# EAGLE board CPC_RAM512K_V1.00 (EAGLE 6.4)
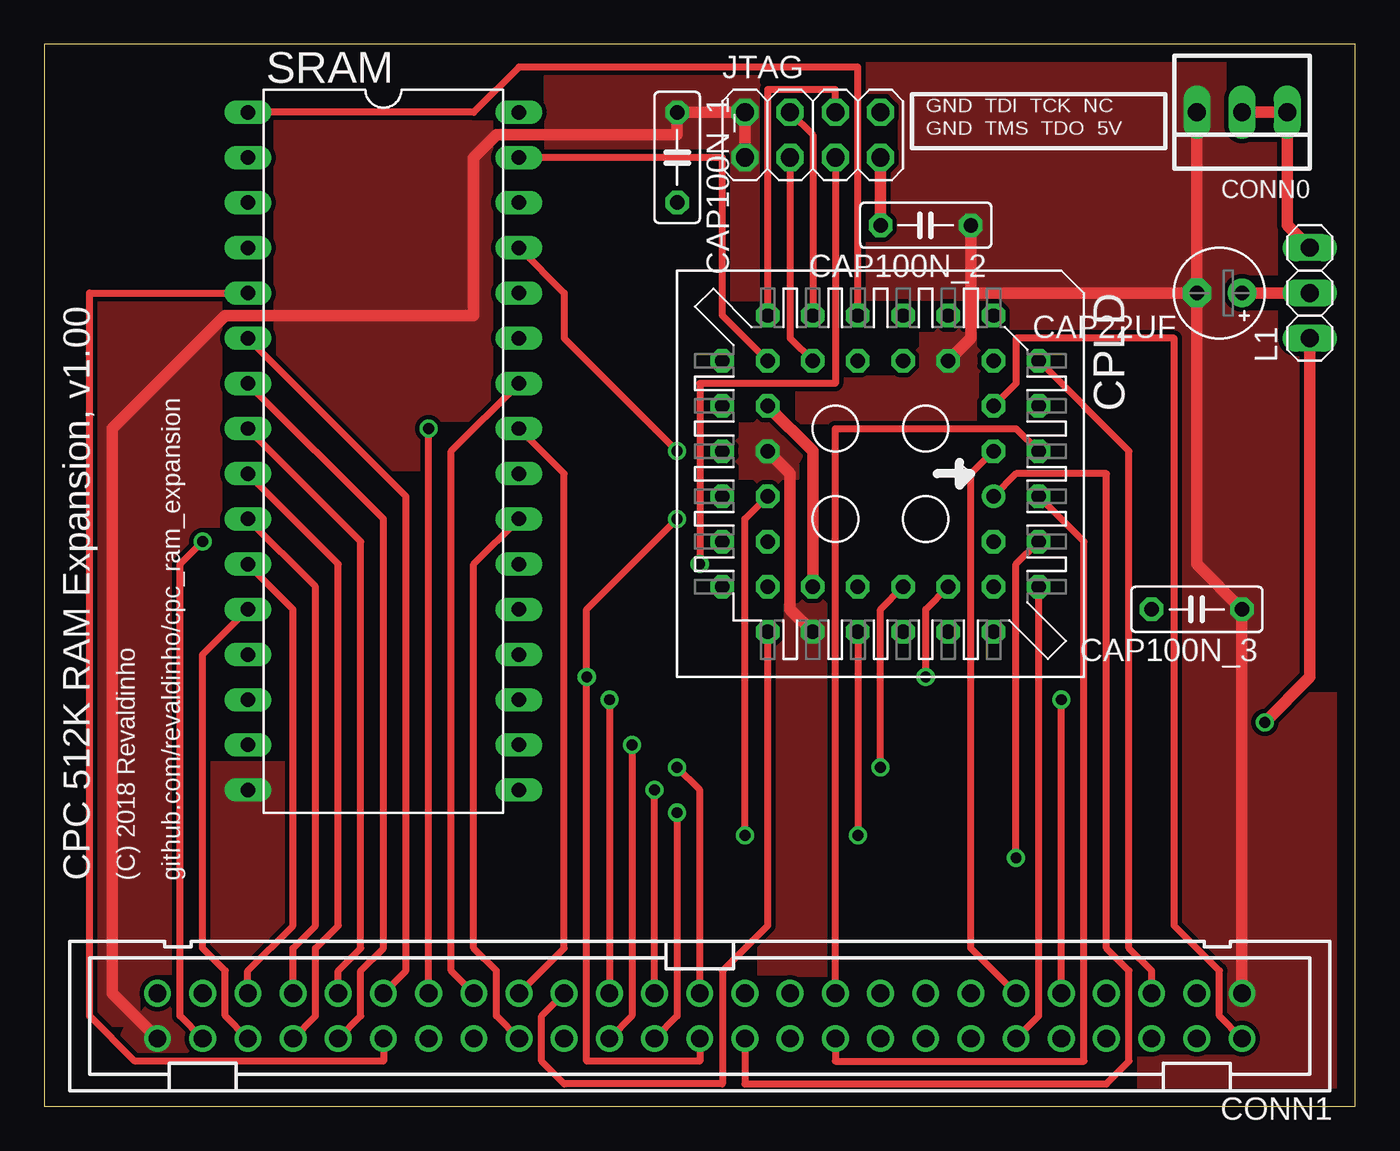
[diagram p0: board, top side]
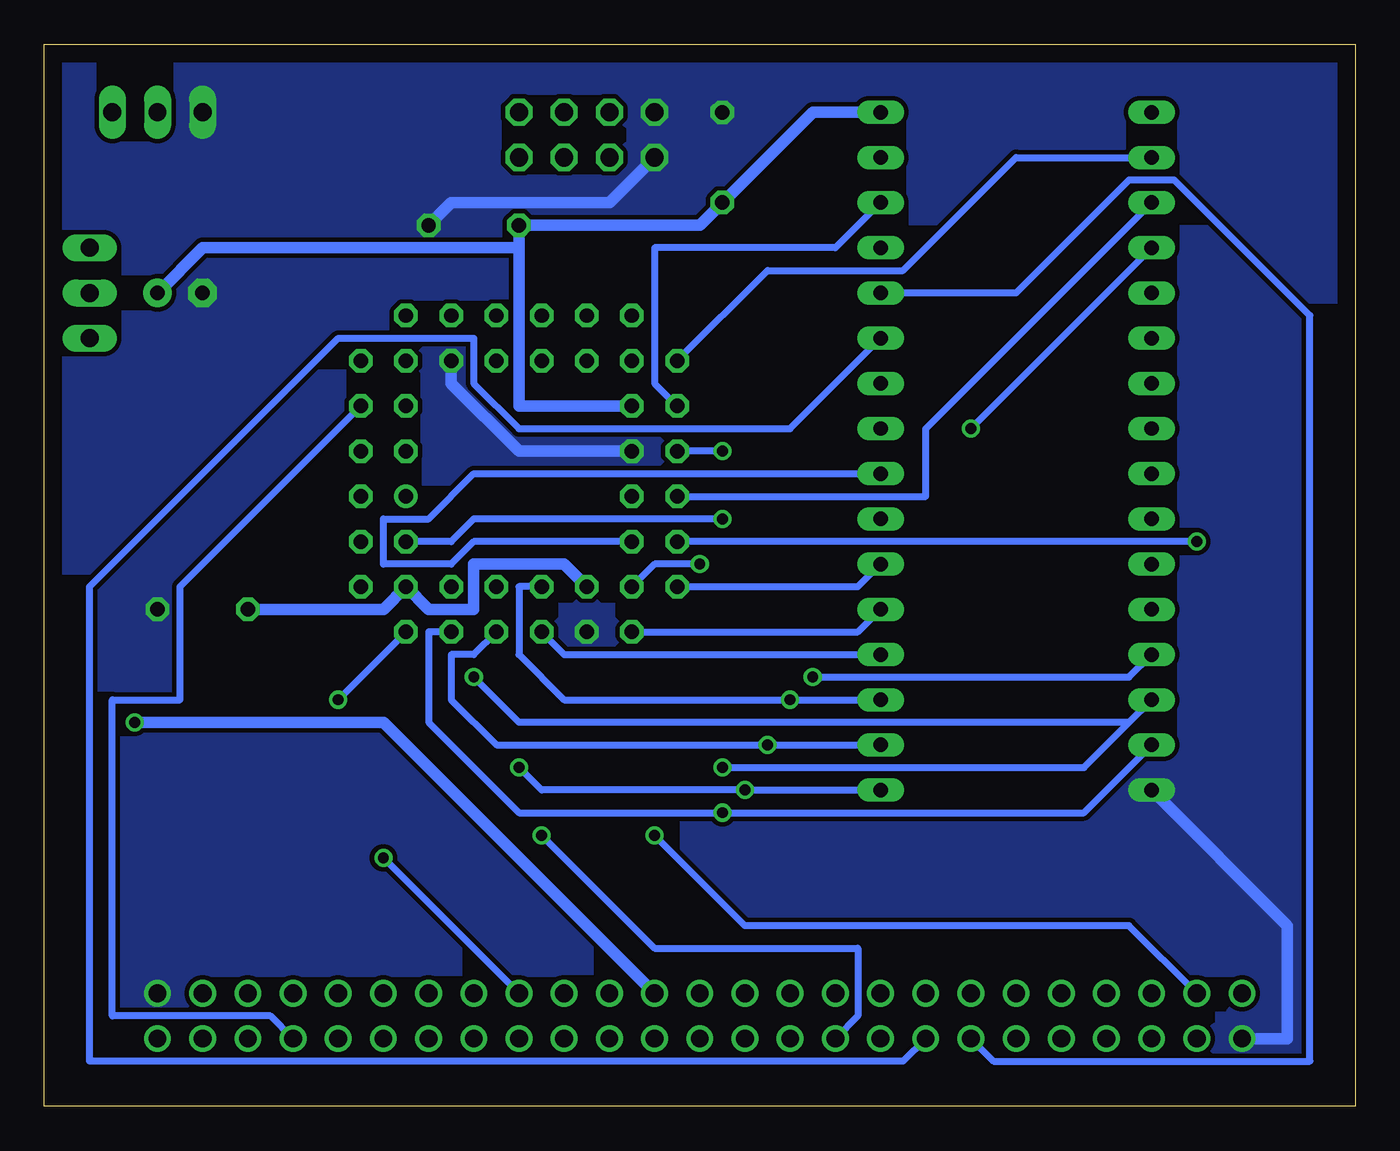
[diagram p1: board, bottom side, seen from below]

Size 73.66 x 59.69 mm. Coordinates in mm from the lower left corner, seen from the top.
Outline: 0,0 73.66,0 73.66,59.69 0,59.69 0,0
Copper layers (1*16): Top 0.035mm / dielectric 1.5mm / Bottom 0.035mm
Design rules "default": minimum track width 10mil, minimum drill 24mil, track to track 8mil, track to pad 8mil, pad to pad 8mil, via to via 8mil, smd to smd 8mil, copper to edge 40mil, drill to drill 8mil, minimum pad ring 10mil, minimum via ring 8mil, stop-mask expansion 4mil, vias tented up to drill 0mil, thermal gap 10mil
Net classes: 0 signal: width 0.381 mm, clearance 0.254 mm; 1 supply: width 0.635 mm, clearance 0.254 mm

## Footprints (pad centres in the part's own frame; a part is rotated, then mirrored left to right if it is on the bottom)
E2,5-5 = drill 0.813 pad 1.6: + -1.27,0 | drill 0.813 pad 1.6 octagon: - 1.27,0
C050-025X075 = drill 0.813 octagon: 1 -2.54,0; 2 2.54,0
22-23-2031 = drill 1 long: 1 -2.54,0; 2 0,0; 3 2.54,0
PAK100/2500-50 = drill 1 pad 1.422: 1 -30.48,-1.27; 2 -30.48,1.27; 3 -27.94,-1.27; 4 -27.94,1.27; 5 -25.4,-1.27; 6 -25.4,1.27; 7 -22.86,-1.27; 8 -22.86,1.27; 9 -20.32,-1.27; 10 -20.32,1.27; 11 -17.78,-1.27; 12 -17.78,1.27; 13 -15.24,-1.27; 14 -15.24,1.27; 15 -12.7,-1.27; 16 -12.7,1.27; 17 -10.16,-1.27; 18 -10.16,1.27; 19 -7.62,-1.27; 20 -7.62,1.27; 21 -5.08,-1.27; 22 -5.08,1.27; 23 -2.54,-1.27; 24 -2.54,1.27; 25 0,-1.27; 26 0,1.27; 27 2.54,-1.27; 28 2.54,1.27; 29 5.08,-1.27; 30 5.08,1.27; 31 7.62,-1.27; 32 7.62,1.27; 33 10.16,-1.27; 34 10.16,1.27; 35 12.7,-1.27; 36 12.7,1.27; 37 15.24,-1.27; 38 15.24,1.27; 39 17.78,-1.27; 40 17.78,1.27; 41 20.32,-1.27; 42 20.32,1.27; 43 22.86,-1.27; 44 22.86,1.27; 45 25.4,-1.27; 46 25.4,1.27; 47 27.94,-1.27; 48 27.94,1.27; 49 30.48,-1.27; 50 30.48,1.27
PLCC-S44-SOCKET = drill 0.813: 1 1.27,6.35 | drill 0.813 octagon: 2 -1.27,8.89; 3 -1.27,6.35; 4 -3.81,8.89; 5 -3.81,6.35; 6 -6.35,8.89; 7 -8.89,6.35; 8 -6.35,6.35; 9 -8.89,3.81; 10 -6.35,3.81; 11 -8.89,1.27; 12 -6.35,1.27; 13 -8.89,-1.27; 14 -6.35,-1.27; 15 -8.89,-3.81; 16 -6.35,-3.81; 17 -8.89,-6.35; 18 -6.35,-8.89; 19 -6.35,-6.35; 20 -3.81,-8.89; 21 -3.81,-6.35; 22 -1.27,-8.89; 23 -1.27,-6.35; 24 1.27,-8.89; 25 1.27,-6.35; 26 3.81,-8.89; 27 3.81,-6.35; 28 6.35,-8.89; 29 8.89,-6.35; 30 6.35,-6.35; 31 8.89,-3.81; 32 6.35,-3.81; 33 8.89,-1.27; 34 6.35,-1.27; 35 8.89,1.27; 36 6.35,1.27; 37 8.89,3.81; 38 6.35,3.81; 39 8.89,6.35; 40 6.35,8.89; 41 6.35,6.35; 42 3.81,8.89; 43 3.81,6.35; 44 1.27,8.89
2X04 = drill 1.016 octagon: 1 -3.81,-1.27; 2 -3.81,1.27; 3 -1.27,-1.27; 4 -1.27,1.27; 5 1.27,-1.27; 6 1.27,1.27; 7 3.81,-1.27; 8 3.81,1.27
1X03 = drill 1.016 long: 1 -2.54,0; 2 0,0; 3 2.54,0
DIL32 = drill 0.813 long: 1 -19.05,-7.62; 2 -16.51,-7.62; 3 -13.97,-7.62; 4 -11.43,-7.62; 5 -8.89,-7.62; 6 -6.35,-7.62; 7 -3.81,-7.62; 8 -1.27,-7.62; 9 1.27,-7.62; 10 3.81,-7.62; 11 6.35,-7.62; 12 8.89,-7.62; 13 11.43,-7.62; 14 13.97,-7.62; 15 16.51,-7.62; 16 19.05,-7.62; 17 19.05,7.62; 18 16.51,7.62; 19 13.97,7.62; 20 11.43,7.62; 21 8.89,7.62; 22 6.35,7.62; 23 3.81,7.62; 24 1.27,7.62; 25 -1.27,7.62; 26 -3.81,7.62; 27 -6.35,7.62; 28 -8.89,7.62; 29 -11.43,7.62; 30 -13.97,7.62; 31 -16.51,7.62; 32 -19.05,7.62

## Placement (x,y rotation side)
CAP22UF  [E2,5-5]  66.04,45.72 180 top
CAP100N_1  [C050-025X075]  35.56,53.34 270 top
CAP100N_2  [C050-025X075]  49.53,49.53 180 top
CAP100N_3  [C050-025X075]  64.77,27.94 180 top
CONN0  [22-23-2031]  67.31,55.88 180 top
CONN1  [PAK100/2500-50]  36.83,5.08 180 top
CPLD  [PLCC-S44-SOCKET]  46.99,35.56 270 top
JTAG  [2X04]  43.18,54.61 0 top
L1  [1X03]  71.12,45.72 90 top
SRAM  [DIL32]  19.05,36.83 270 top

## Library data of the parts
CAP22UF CAP100N_1-CAP100N_3 = resistor
CONN0 = con-molex
CONN1 = con-3m
CPLD SRAM = ic-package
JTAG L1 = pinhead

## Nets
A0: CONN1.34 SRAM.23
A1: CONN1.33 SRAM.25
A2: CONN1.36 SRAM.27
A3: CONN1.35 SRAM.26
A4: CONN1.38 SRAM.28
A5: CONN1.37 SRAM.4
A6: CONN1.40 SRAM.5
A7: CONN1.39 SRAM.6
A8: CONN1.42 SRAM.7
A9: CONN1.41 SRAM.8
A10: CONN1.44 SRAM.9
A11: CONN1.43 SRAM.10
A12: CONN1.46 SRAM.12
A13: CONN1.45 SRAM.11
A14: CONN1.48 CPLD.26
A15: CONN1.47 CPLD.25
BUSACK_B: CONN1.14
BUSRESET_B: CONN1.12 CPLD.40
BUSRQ_B: CONN1.13
CLK: CONN1.2 CPLD.5
CURSOR: CONN1.6
D0: CONN1.26 CPLD.43 SRAM.13
D1: CONN1.25 CPLD.38 SRAM.14
D2: CONN1.28 CPLD.37 SRAM.15
D3: CONN1.27 CPLD.36 SRAM.17
D4: CONN1.30 CPLD.35 SRAM.18
D5: CONN1.29 CPLD.34 SRAM.19
D6: CONN1.32 CPLD.33 SRAM.20
D7: CONN1.31 CPLD.29 SRAM.21
EXP_B: CONN1.4
HALT_B: CONN1.18
HIADR0: CPLD.24 SRAM.3
HIADR1: CPLD.19 SRAM.31
HIADR2: CPLD.18 SRAM.2
HIADR3: CPLD.20 SRAM.30
HIADR4: CPLD.13 SRAM.1
INT_B: CONN1.15
IOREQ_B: CONN1.19 CPLD.2
LPEN: CONN1.3
M1_B: CONN1.21
MREQ_B: CONN1.24 CPLD.1
NMI_B: CONN1.16
RAMCS_B: CPLD.28 SRAM.22
RAMDIS: CONN1.5 CPLD.6
RAMOE_B: CPLD.27 SRAM.24
RAMRD_B: CONN1.8 CPLD.4
RAMWE_B: CPLD.22 SRAM.29
RD_B: CONN1.20 CPLD.44
READY: CONN1.11 CPLD.3
RESET_B: CONN1.9 CPLD.39
RFSH_B: CONN1.22
ROMDIS: CONN1.7
ROMEN_B: CONN1.10
SOUND: CONN1.49
TCK: CPLD.17 JTAG.6
TDI: CPLD.15 JTAG.4
TDO: CPLD.30 JTAG.5
TMS: CPLD.16 JTAG.3
VDD [supply]: CAP22UF.+ CAP100N_1.2 CAP100N_2.2 CAP100N_3.2 CPLD.21 CPLD.32 CPLD.41 JTAG.7 L1.2 SRAM.32
VDD_CPC [supply]: CONN1.23 L1.1
VDD_EXT [supply]: CONN0.1 CONN0.2 L1.3
VSS [supply]: CAP22UF.- CAP100N_1.1 CAP100N_2.1 CAP100N_3.1 CONN0.3 CONN1.1 CONN1.50 CPLD.10 CPLD.23 CPLD.31 JTAG.1 JTAG.2 SRAM.16
WR_B: CONN1.17 CPLD.42

## Tracks (layer width: path | path; a pad name or v marks a point on that pad's centre or on a via)
A0
  Top 0.381: SRAM.23 24.13,30.48 24.13,8.89 25.4,7.62 25.4,5.08 CONN1.34
A1
  Top 0.381: SRAM.25 29.21,35.56 29.21,8.89 CONN1.33
A2
  Bottom 0.381: SRAM.27 31.75,38.1 46.99,38.1 49.53,40.64 49.53,43.18 57.15,43.18 71.12,29.21 71.12,2.54 25.4,2.54 CONN1.36
A3
  Top 0.381: SRAM.26 22.86,36.83 22.86,7.62 CONN1.35
A4
  Bottom 0.381: SRAM.28 19.05,45.72 12.7,52.07 10.16,52.07 2.54,44.45 2.54,2.54 20.32,2.54 CONN1.38
A5  (via drill 0.61)
  Top 0.381: CONN1.37 v21.59,38.1
  Bottom 0.381: v21.59,38.1 SRAM.4
A6
  Top 0.381: SRAM.5 2.54,45.72 2.54,5.08 5.08,2.54 19.05,2.54 CONN1.40
A7
  Top 0.381: SRAM.6 20.32,34.29 20.32,7.62 CONN1.39
A8
  Top 0.381: SRAM.7 19.05,33.02 19.05,8.89 17.78,7.62 17.78,5.08 CONN1.42
A9
  Top 0.381: SRAM.8 17.78,31.75 17.78,8.89 16.51,7.62 CONN1.41
A10
  Top 0.381: SRAM.9 16.51,30.48 16.51,10.16 15.24,8.89 15.24,5.08 CONN1.44
A11
  Top 0.381: SRAM.10 15.24,29.21 15.24,10.16 13.97,8.89 CONN1.43
A12
  Top 0.381: SRAM.12 8.89,25.4 8.89,8.89 10.16,7.62 10.16,5.08 CONN1.46
A13
  Top 0.381: SRAM.11 13.97,27.94 13.97,10.16 11.43,7.62 CONN1.45
A14  (via drill 0.61)
  Top 0.381: v8.89,31.75 7.62,30.48 7.62,5.08 CONN1.48
  Bottom 0.381: v8.89,31.75 CPLD.26
A15  (via drill 0.61)
  Top 0.381: CPLD.25 39.37,33.02 v39.37,15.24
  Bottom 0.381: v39.37,15.24 34.29,10.16 12.7,10.16 CONN1.47
BUSRESET_B
  Top 0.381: CPLD.40 55.88,5.08 CONN1.12
CLK
  Top 0.381: CPLD.5 54.61,40.64 54.61,43.18 63.5,43.18 63.5,10.16 66.04,7.62 66.04,5.08 CONN1.2
D0  (via drill 0.61)
  Top 0.381: CONN1.26 36.83,2.54 30.48,2.54 v30.48,24.13 30.48,27.94 v35.56,33.02
  Bottom 0.381: SRAM.13 12.7,24.13 v30.48,24.13 | CPLD.43 50.8,31.75 49.53,33.02 v35.56,33.02
D1  (via drill 0.61)
  Top 0.381: v35.56,19.05 36.83,17.78 CONN1.25 | CPLD.38 49.53,27.94 v49.53,24.13
  Bottom 0.381: 12.7,21.59 15.24,19.05 v35.56,19.05 | 12.7,21.59 SRAM.14 | v49.53,24.13 46.99,21.59 12.7,21.59
D2  (via drill 0.61)
  Top 0.381: CONN1.28 35.56,5.08 v35.56,16.51
  Bottom 0.381: SRAM.15 15.24,16.51 v35.56,16.51 46.99,16.51 52.07,21.59 52.07,26.67 CPLD.37
D3  (via drill 0.61)
  Top 0.381: CONN1.27 v34.29,17.78 | CPLD.36 46.99,27.94 v46.99,19.05
  Bottom 0.381: SRAM.17 v34.29,17.78 45.72,17.78 v46.99,19.05
D4  (via drill 0.61)
  Top 0.381: CONN1.30 33.02,5.08 v33.02,20.32
  Bottom 0.381: SRAM.18 v33.02,20.32 48.26,20.32 50.8,22.86 50.8,25.4 49.53,25.4 CPLD.35
D5  (via drill 0.61)
  Top 0.381: v31.75,22.86 CONN1.29
  Bottom 0.381: SRAM.19 v31.75,22.86 44.45,22.86 46.99,25.4 46.99,29.21 CPLD.34
D6  (via drill 0.61)
  Top 0.381: CPLD.33 v45.72,15.24
  Bottom 0.381: SRAM.20 44.45,25.4 CPLD.33 | CONN1.32 27.94,5.08 27.94,8.89 39.37,8.89 v45.72,15.24
D7
  Top 0.381: CONN1.31 27.94,5.08 27.94,2.54 29.21,1.27 38.1,1.27 38.1,7.62 40.64,10.16 CPLD.29
  Bottom 0.381: SRAM.21 27.94,26.67 CPLD.29
HIADR0
  Bottom 0.381: SRAM.3 24.13,38.1 24.13,34.29 CPLD.24
HIADR1
  Top 0.381: SRAM.31 38.1,53.34 38.1,44.45 CPLD.19
HIADR2
  Bottom 0.381: SRAM.2 19.05,53.34 25.4,46.99 33.02,46.99 CPLD.18
HIADR3
  Bottom 0.381: CPLD.20 39.37,40.64 39.37,48.26 29.21,48.26 SRAM.30
HIADR4
  Top 0.381: SRAM.1 24.13,55.88 26.67,58.42 45.72,58.42 CPLD.13
IOREQ_B
  Top 0.381: CPLD.2 54.61,38.1 44.45,38.1 CONN1.19
MREQ_B
  Top 0.381: CPLD.1 54.61,35.56 59.69,35.56 59.69,8.89 60.96,7.62 60.96,2.54 59.69,1.27 39.37,1.27 CONN1.24
RAMCS_B
  Bottom 0.381: SRAM.22 27.94,29.21 CPLD.28
RAMDIS
  Top 0.381: CPLD.6 60.96,36.83 60.96,8.89 62.23,7.62 CONN1.5
RAMOE_B
  Bottom 0.381: SRAM.24 49.53,35.56 52.07,33.02 54.61,33.02 54.61,30.48 50.8,30.48 49.53,31.75 CPLD.27
RAMRD_B
  Bottom 0.381: CPLD.4 66.04,29.21 66.04,22.86 69.85,22.86 69.85,5.08 60.96,5.08 CONN1.8
RAMWE_B  (via drill 0.61)
  Top 0.381: v35.56,36.83 29.21,43.18 29.21,45.72 SRAM.29
  Bottom 0.381: v35.56,36.83 CPLD.22
RD_B
  Top 0.381: CPLD.44 58.42,31.75 58.42,2.54 44.45,2.54 CONN1.20
READY
  Top 0.381: CPLD.3 52.07,35.56 52.07,8.89 CONN1.11
RESET_B  (via drill 0.61)
  Top 0.381: CONN1.9 v57.15,22.86
  Bottom 0.381: v57.15,22.86 CPLD.39
TCK
  Top 0.381: CPLD.17 40.64,57.15 44.45,57.15 JTAG.6
TDI
  Top 0.381: CPLD.15 43.18,54.61 JTAG.4
TDO  (via drill 0.61)
  Top 0.381: v36.83,30.48 36.83,40.64 44.45,40.64 JTAG.5
  Bottom 0.381: CPLD.30 39.37,30.48 v36.83,30.48
TMS
  Top 0.381: CPLD.16 41.91,43.18 JTAG.3
VDD
  Top 0.635: CAP22UF.+ L1.2 | JTAG.7 CAP100N_2.2 | CPLD.21 43.18,36.83 CPLD.32
  Bottom 0.635: SRAM.32 30.48,55.88 CAP100N_1.2 36.83,49.53 CAP100N_2.2 46.99,48.26 | CAP100N_3.2 54.61,27.94 CPLD.41 52.07,27.94 49.53,27.94 49.53,30.48 44.45,30.48 CPLD.32 | 46.99,48.26 46.99,39.37 CPLD.21 | CAP22UF.+ 64.77,48.26 46.99,48.26
VDD_CPC  (via drill 0.61)
  Top 0.635: v68.58,21.59 71.12,24.13 L1.1
  Bottom 0.635: CONN1.23 54.61,21.59 v68.58,21.59
VDD_EXT
  Top 0.635: CONN0.2 CONN0.1 69.85,49.53 L1.3
VSS
  Top 0.635: CAP22UF.- 64.77,30.48 CAP100N_3.1 CONN1.1 | CAP22UF.- CONN0.3 | CPLD.23 41.91,35.56 41.91,27.94 CPLD.31 | JTAG.1 JTAG.2 CAP100N_1.1 35.56,54.61 25.4,54.61 24.13,53.34 24.13,44.45 10.16,44.45 3.81,38.1 3.81,6.35 CONN1.50 | CPLD.10 52.07,43.18 52.07,45.72 | CAP100N_2.1 52.07,45.72 | 52.07,45.72 CAP22UF.-
  Bottom 0.635: SRAM.16 3.81,10.16 3.81,3.81 CONN1.50 | JTAG.1 41.91,50.8 50.8,50.8 CAP100N_2.1 | CPLD.23 46.99,36.83 50.8,40.64 CPLD.10
  pour Top: 0,0 0,59.69 74.93,59.69 74.93,0
  pour Bottom: 0,0 0,59.69 74.93,59.69 74.93,0
WR_B  (via drill 0.61)
  Top 0.381: CPLD.42 54.61,30.48 v54.61,13.97
  Bottom 0.381: CONN1.17 v54.61,13.97

## Text on the board
tPlace: GND TDI TCK NC | GND TMS TDO 5V | CPC 512K RAM Expansion, v1.00 | (C) 2018 Revaldinho | github.com/revaldinho/cpc_ram_expansion